# Allegro board kvp_03v1.brd
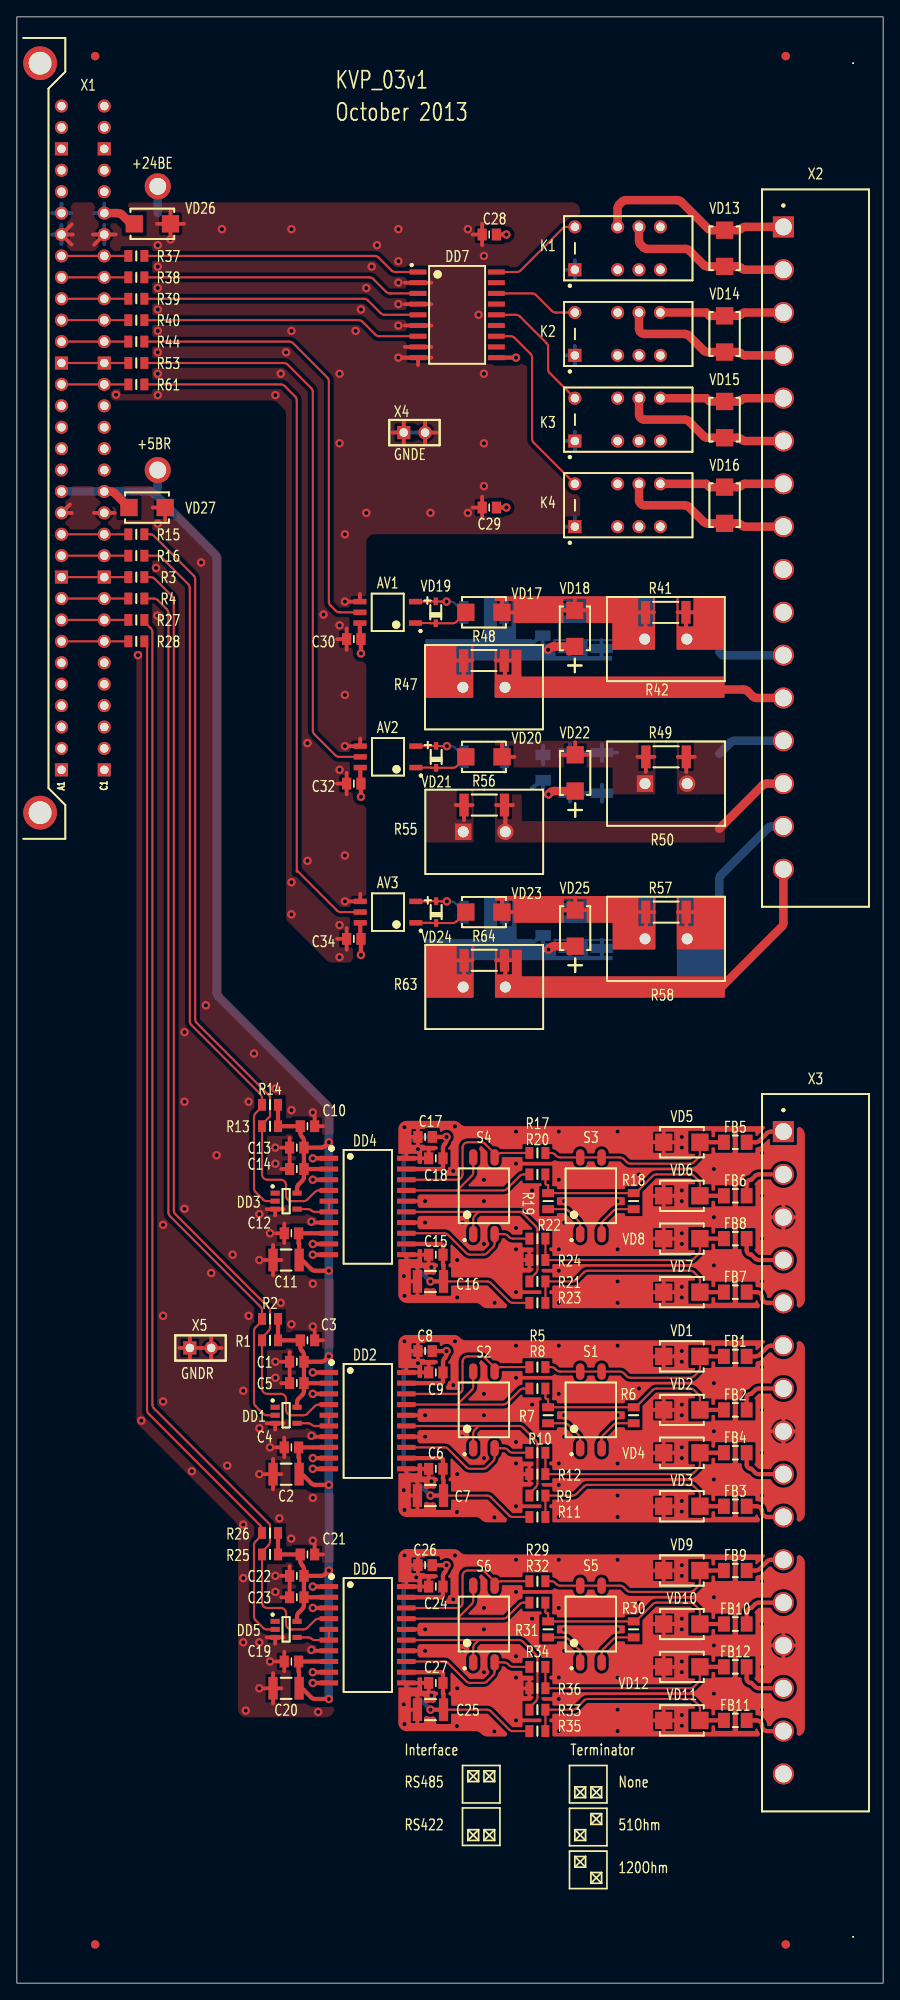
[diagram p0: board, top side]
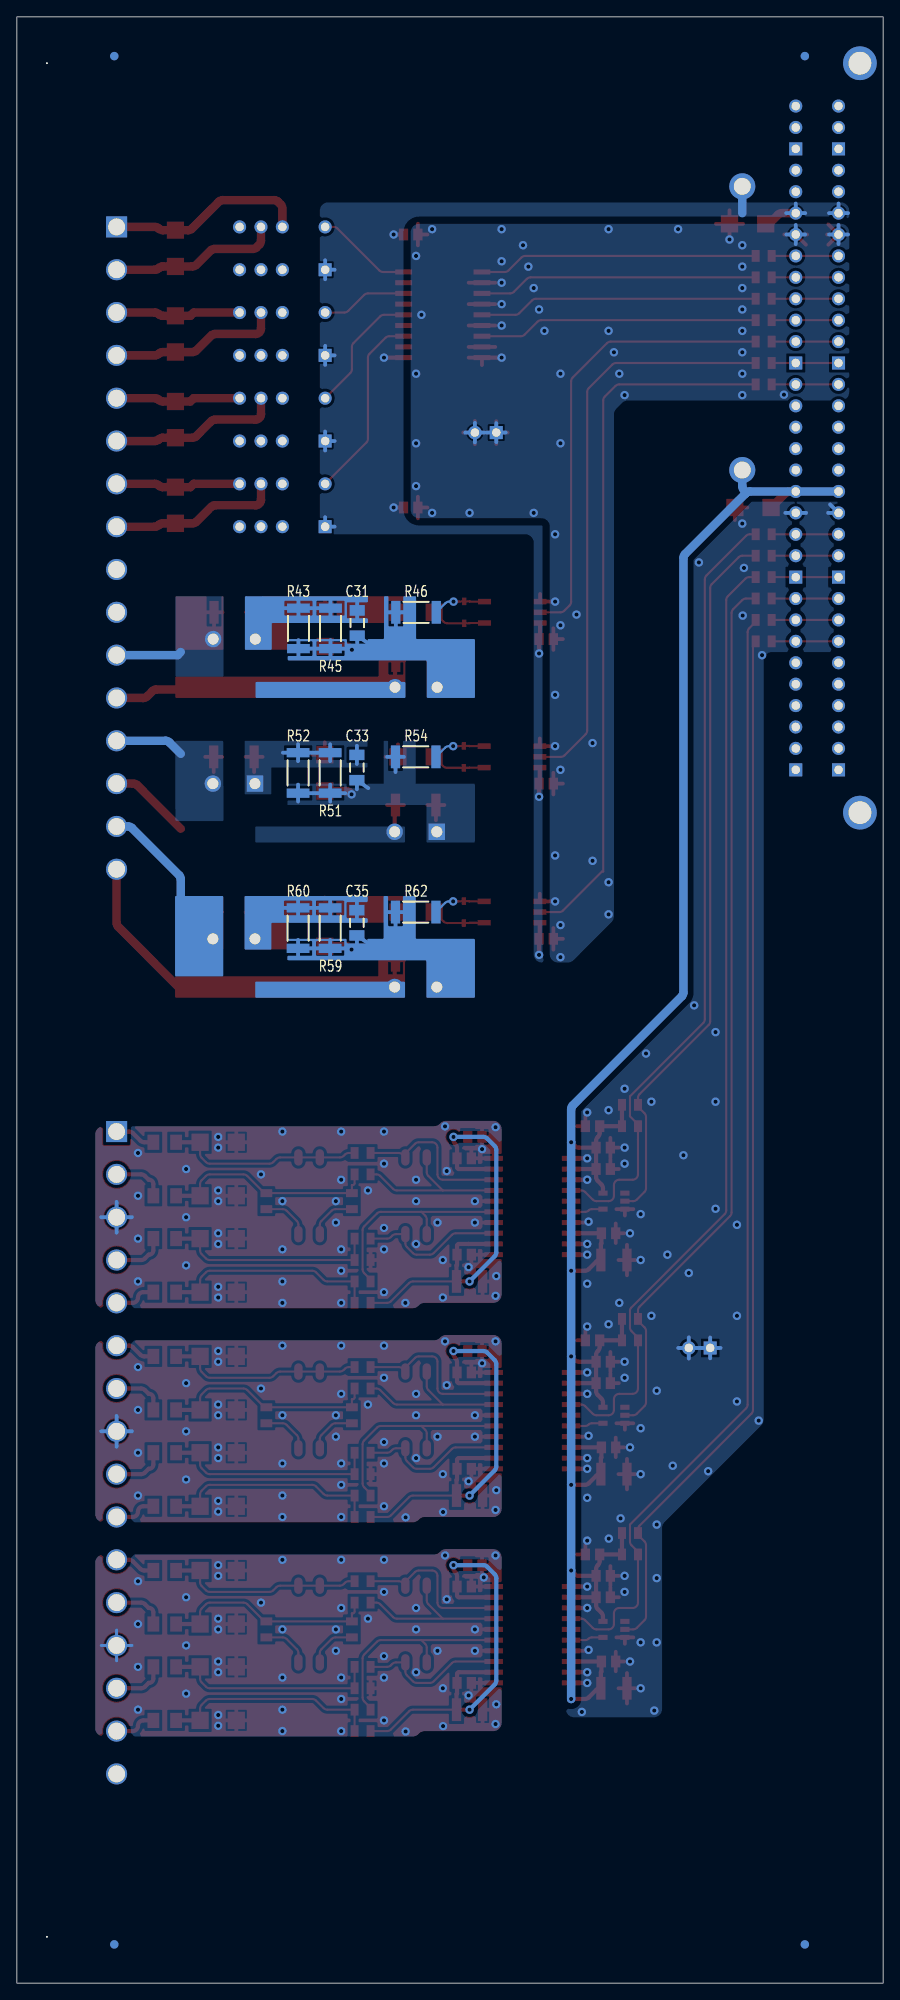
[diagram p1: board, bottom side, seen from below]

Outline 102.87 x 233.25 mm; copper layers: TOP, BOTTOM. Coordinates in mm from the lower left corner of the outline.
Outline path: rectangle 0,0 102.87,233.25

## Design rules (mm)
net group PWR: nets +5BR

## Placement (name value [footprint] x y rotation side)
AV1  ACPL-M50L  [SOIC127P650X260-5]  44.03 162.61 180 top
AV2  ACPL-M50L  [SOIC127P650X260-5]  44.08 145.47 180 top
AV3  ACPL-M50L  [SOIC127P650X260-5]  44.08 127.05 180 top
C1  0.1u  [CAPC2013X95N]  33.24 73.71 180 top
C2  10.0u  [CAPC3225X220N]  31.97 60.38 180 top
C3  0.1u  [CAPC2013X95N]  34.51 76.25 0 top
C4  0.1u  [CAPC2013X95N]  32.6 63.55 180 top
C5  0.01u  [CAPC2013X95N]  33.24 71.17 180 top
C6  0.1u  [CAPC2013X95N]  49.75 61.01 180 top
C7  10.0u  [CAPC3225X220N]  49.12 57.84 180 top
C8  0.01u  [CAPC2013X95N]  48.48 74.98 180 top
C9  0.1u  [CAPC2013X95N]  49.75 72.44 180 top
C10  0.1u  [CAPC2013X95N]  34.51 101.65 0 top
C11  10.0u  [CAPC3225X220N]  31.97 85.78 180 top
C12  0.1u  [CAPC2013X95N]  32.6 88.95 180 top
C13  0.1u  [CAPC2013X95N]  33.24 99.11 180 top
C14  0.01u  [CAPC2013X95N]  33.24 96.57 180 top
C15  0.1u  [CAPC2013X95N]  49.75 86.41 180 top
C16  10.0u  [CAPC3225X220N]  49.12 83.24 180 top
C17  0.01u  [CAPC2013X95N]  48.48 100.38 180 top
C18  0.1u  [CAPC2013X95N]  49.75 97.84 180 top
C19  0.1u  [CAPC2013X95N]  32.6 38.15 180 top
C20  10.0u  [CAPC3225X220N]  31.97 34.98 180 top
C21  0.1u  [CAPC2013X95N]  34.51 50.85 0 top
C22  0.1u  [CAPC2013X95N]  33.24 48.31 180 top
C23  0.01u  [CAPC2013X95N]  33.24 45.77 180 top
C24  0.1u  [CAPC2013X95N]  49.75 47.04 180 top
C25  10.0u  [CAPC3225X220N]  49.12 32.44 180 top
C26  0.01u  [CAPC2013X95N]  48.48 49.58 180 top
C27  0.1u  [CAPC2013X95N]  49.75 35.61 180 top
C28  0.1u  [CAPC2013X95N]  56.1 207.43 180 top
C29  0.1u  [CAPC2013X95N]  56.1 175.04 180 top
C30  0.1u  [CAPC2013X95N]  40.01 159.44 180 top
C31  0.1u  [CAPC3216X145N]  62.45 161.34 270 bottom
C32  0.1u  [CAPC2013X95N]  40.01 142.29 180 top
C33  0.1u  [CAPC3216X145N]  62.49 144.2 270 bottom
C34  0.1u  [CAPC2013X95N]  40.01 123.88 180 top
C35  0.1u  [CAPC3216X145N]  62.49 125.78 270 bottom
DD1  SN74LVC1G14DBV  [SOT95P280X145-5N]  31.97 67.36 0 top
DD2  ADM2587  [SOIC127P1032X265-20]  37.05 72.44 270 top
DD3  SN74LVC1G14DBV  [SOT95P280X145-5N]  31.97 92.76 0 top
DD4  ADM2587  [SOIC127P1032X265-20]  37.05 97.84 270 top
DD5  SN74LVC1G14DBV  [SOT95P280X145-5N]  31.97 41.96 0 top
DD6  ADM2587  [SOIC127P1032X265-20]  37.05 47.04 270 top
DD7  ULN2803A  [SOIC127P1030X265-18N]  52.29 197.91 0 top
FB1  BLM31P  [FB3216X130N]  85.31 74.35 0 top
FB2  BLM31P  [FB3216X130N]  85.31 68 0 top
FB3  BLM31P  [FB3216X130N]  85.31 56.57 0 top
FB4  BLM31P  [FB3216X130N]  85.31 62.92 0 top
FB5  BLM31P  [FB3216X130N]  85.31 99.75 0 top
FB6  BLM31P  [FB3216X130N]  85.31 93.4 0 top
FB7  BLM31P  [FB3216X130N]  85.31 81.97 0 top
FB8  BLM31P  [FB3216X130N]  85.31 88.32 0 top
FB9  BLM31P  [FB3216X130N]  85.31 48.95 0 top
FB10  BLM31P  [FB3216X130N]  85.31 42.6 0 top
FB11  BLM31P  [FB3216X130N]  85.31 31.17 0 top
FB12  BLM31P  [FB3216X130N]  85.31 37.52 0 top
K1  FX2  [RELAY_FX2]  72.58 205.79 90 top
K2  FX2  [RELAY_FX2]  72.58 195.63 90 top
K3  FX2  [RELAY_FX2]  72.58 185.47 90 top
K4  FX2  [RELAY_FX2]  72.58 175.31 90 top
MH1  1.8mm  [MTG_180_310]  16.73 213.15 0 top
MH2  1.8mm  [MTG_180_310]  16.73 179.49 0 top
NOREF  -  [unnamed]  99.3 5.5 0 top
NOREF#2  -  [unnamed#2]  9.3 228.59 0 top
NOREF#3  -  [unnamed]  99.3 227.75 0 top
NOREF#4  -  [unnamed#2]  91.3 228.59 0 top
NOREF#5  -  [unnamed#2]  91.3 4.59 0 top
NOREF#6  -  [unnamed#2]  9.3 4.59 0 top
NOREF#7  -  [unnamed#2]  9.3 4.59 180 bottom
NOREF#8  -  [unnamed#2]  9.3 228.59 180 bottom
NOREF#9  -  [unnamed#2]  91.3 4.59 180 bottom
NOREF#10  -  [unnamed#2]  91.3 228.59 180 bottom
R1  10k  [RESC2013X60N]  30.07 76.25 0 top
R2  10k  [RESC2013X60N]  30.07 78.79 0 top
R3  100  [RESC2013X60N]  14.19 166.79 0 top
R4  100  [RESC2013X60N]  14.19 164.25 0 top
R5  10  [RESC2013X60N]  61.81 73.08 0 top
R6  51  [RESC2013X60N]  73.25 67.36 270 top
R7  120  [RESC2013X60N]  63.09 67.36 270 top
R8  10  [RESC2013X60N]  61.81 70.54 0 top
R9  10  [RESC2013X60N]  61.81 57.84 0 top
R10  10  [RESC2013X60N]  61.81 62.92 0 top
R11  470  [RESC2013X60N]  61.81 55.3 0 top
R12  470  [RESC2013X60N]  61.81 60.38 0 top
R13  10k  [RESC2013X60N]  30.07 101.65 0 top
R14  10k  [RESC2013X60N]  30.07 104.19 0 top
R15  100  [RESC2013X60N]  14.19 171.87 0 top
R16  100  [RESC2013X60N]  14.19 169.33 0 top
R17  10  [RESC2013X60N]  61.81 98.48 0 top
R18  51  [RESC2013X60N]  73.25 92.76 270 top
R19  120  [RESC2013X60N]  63.09 92.76 270 top
R20  10  [RESC2013X60N]  61.81 95.94 0 top
R21  10  [RESC2013X60N]  61.81 83.24 0 top
R22  10  [RESC2013X60N]  61.81 88.32 0 top
R23  470  [RESC2013X60N]  61.81 80.7 0 top
R24  470  [RESC2013X60N]  61.81 85.78 0 top
R25  10k  [RESC2013X60N]  30.07 50.85 0 top
R26  10k  [RESC2013X60N]  30.07 53.39 0 top
R27  100  [RESC2013X60N]  14.19 161.71 0 top
R28  100  [RESC2013X60N]  14.19 159.17 0 top
R29  10  [RESC2013X60N]  61.81 47.68 0 top
R30  51  [RESC2013X60N]  73.25 41.96 270 top
R31  120  [RESC2013X60N]  63.09 41.96 270 top
R32  10  [RESC2013X60N]  61.81 45.14 0 top
R33  10  [RESC2013X60N]  61.81 32.44 0 top
R34  10  [RESC2013X60N]  61.81 37.52 0 top
R35  470  [RESC2013X60N]  61.81 29.9 0 top
R36  470  [RESC2013X60N]  61.81 34.98 0 top
R37  6.2k  [RESC2013X60N]  14.19 204.89 0 top
R38  6.2k  [RESC2013X60N]  14.19 202.35 0 top
R39  6.2k  [RESC2013X60N]  14.19 199.81 0 top
R40  6.2k  [RESC2013X60N]  14.19 197.27 0 top
R41  470  [RESC5025X65N]  77.06 162.61 0 top
R42  5.1k  [RESV500P1300W900L2500H]  77.06 159.44 0 top
R43  1.2k  [RESC5025X65N]  69.44 160.71 90 bottom
R44  2k  [RESC2013X60N]  14.19 194.73 0 top
R45  1k  [RESC5025X65N]  65.62 160.71 90 bottom
R46  1k  [RESC5025X65N]  55.47 162.61 0 bottom
R47  5.1k  [RESV500P1300W900L2500H]  55.47 153.72 0 top
R48  470  [RESC5025X65N]  55.47 156.9 0 top
R49  470  [RESC5025X65N]  77.09 145.47 0 top
R50  5.1k  [RESV500P1300W900L2500H]  77.09 142.29 0 top
R51  1k  [RESC5025X65N]  65.67 143.56 90 bottom
R52  1.2k  [RESC5025X65N]  69.47 143.56 90 bottom
R53  2k  [RESC2013X60N]  14.19 192.19 0 top
R54  1k  [RESC5025X65N]  55.51 145.47 0 bottom
R55  5.1k  [RESV500P1300W900L2500H]  55.51 136.58 0 top
R56  470  [RESC5025X65N]  55.51 139.75 0 top
R57  470  [RESC5025X65N]  77.09 127.05 0 top
R58  5.1k  [RESV500P1300W900L2500H]  77.09 123.88 0 top
R59  1k  [RESC5025X65N]  65.67 125.15 90 bottom
R60  1.2k  [RESC5025X65N]  69.47 125.15 90 bottom
R61  2k  [RESC2013X60N]  14.19 189.65 0 top
R62  1k  [RESC5025X65N]  55.51 127.05 0 bottom
R63  5.1k  [RESV500P1300W900L2500H]  55.51 118.16 0 top
R64  470  [RESC5025X65N]  55.51 121.34 0 top
S1  SmWDL-02  [SW_SMWDL-02]  68.17 68 90 top
S2  SmWDL-02  [SW_SMWDL-02]  55.47 68 90 top
S3  SmWDL-02  [SW_SMWDL-02]  68.17 93.4 90 top
S4  SmWDL-02  [SW_SMWDL-02]  55.47 93.4 90 top
S5  SmWDL-02  [SW_SMWDL-02]  68.17 42.6 90 top
S6  SmWDL-02  [SW_SMWDL-02]  55.47 42.6 90 top
VD1  6.8B  [DIOM5236X261N_NP]  78.96 74.35 180 top
VD2  6.8B  [DIOM5236X261N_NP]  78.96 68 180 top
VD3  6.8B  [DIOM5236X261N_NP]  78.96 56.57 180 top
VD4  6.8B  [DIOM5236X261N_NP]  78.96 62.92 180 top
VD5  6.8B  [DIOM5236X261N_NP]  78.96 99.75 180 top
VD6  6.8B  [DIOM5236X261N_NP]  78.96 93.4 180 top
VD7  6.8B  [DIOM5236X261N_NP]  78.96 81.97 180 top
VD8  6.8B  [DIOM5236X261N_NP]  78.96 88.32 180 top
VD9  6.8B  [DIOM5236X261N_NP]  78.96 48.95 180 top
VD10  6.8B  [DIOM5236X261N_NP]  78.96 42.6 180 top
VD11  6.8B  [DIOM5236X261N_NP]  78.96 31.17 180 top
VD12  6.8B  [DIOM5236X261N_NP]  78.96 37.52 180 top
VD13  300B  [DIOM5236X261N_NP]  84.04 205.79 90 top
VD14  300B  [DIOM5236X261N_NP]  84.04 195.63 90 top
VD15  300B  [DIOM5236X261N_NP]  84.04 185.47 90 top
VD16  300B  [DIOM5236X261N_NP]  84.04 175.31 90 top
VD17  6.8B  [DIOM5236X261N_NP]  55.47 162.61 180 top
VD18  18B  [DIOM5236X261N]  66.26 160.71 270 top
VD19  1N4148WS  [SOD2513X100N]  49.75 162.61 90 top
VD20  6.8B  [DIOM5236X261N_NP]  55.47 145.47 180 top
VD21  1N4148WS  [SOD2513X100N]  49.79 145.47 90 top
VD22  18B  [DIOM5236X261N]  66.3 143.56 270 top
VD23  6.8B  [DIOM5236X261N_NP]  55.47 127.05 180 top
VD24  1N4148WS  [SOD2513X100N]  49.79 127.05 90 top
VD25  18B  [DIOM5236X261N]  66.3 125.15 270 top
VD26  30B  [DIOM5236X261N_NP]  16.09 208.7 0 top
VD27  6.8B  [DIOM5236X261N_NP]  15.46 175.04 0 top
X1  DIN-32x2  [DIN_41612_64_MR]  2.12 183.3 0 top
X2  231-576/001-000  [WAGO_231_576_001_000]  94.83 170.23 0 top
X3  231-576/001-000  [WAGO_231_576_001_000]  94.83 62.92 0 top
X4  GNDE  [HDRV1X2P254]  47.21 183.94 0 top
X5  GNDR  [HDRV1X2P254]  21.81 75.35 0 top

## Library data of the parts
AV1-AV3 = ACPL-M50L
C1-C35 = CAP_NP
DD1 DD3 DD5 = 74LVC1G14_g
DD2 DD4 DD6 = ADM2582E_RW20
DD7 = ULN2803A
FB1-FB12 = FERRITE
K1-K4 = RELAY_FX2
MH1 MH2 = MOUNTING_HOLE_PLATED
R1-R40 R44 R53 R61 = RES_0.125W
R41 R43 R45 R46 R48 R49 R51 R52 R54 R56 R57 R59 R60 R62 R64 = RES_0.5W
R42 R47 R50 R55 R58 R63 = RES_5W
S1-S6 = SWITCH_2
VD1-VD17 VD20 VD23 VD26 VD27 = DIODE_TVS_BI
VD18 VD22 VD25 = DIODE_TVS_UNI
VD19 VD21 VD24 = DIODE
X1 = CON_32X2
X2 X3 = CON_16
X4 X5 = CON_2

## Footprints (pads in the part's own frame, mm; a bottom-side part is the same pattern mirrored in y, then rotated)
CAPC2013X95N
  rect 1.1x1.4 smd: 1(-0.85,0) 2(0.85,0)
CAPC3216X145N
  rect 1.25x1.8 smd: 1(-1.5,0) 2(1.5,0)
CAPC3225X220N
  rect 1.1x2.7 smd: 1(-1.55,0) 2(1.55,0)
DIN_41612_64_MR
  rect 1.55x1.55 hole 1: A1(3.175,-39.37) A10(3.175,-16.51) A20(3.175,8.89) A30(3.175,34.29) C1(8.255,-39.37) C10(8.255,-16.51) C20(8.255,8.89) C30(8.255,34.29)
  round 1.55 hole 1: A2(3.175,-36.83) A3(3.175,-34.29) A4(3.175,-31.75) A5(3.175,-29.21) A6(3.175,-26.67) A7(3.175,-24.13) A8(3.175,-21.59) A9(3.175,-19.05) A11(3.175,-13.97) A12(3.175,-11.43) A13(3.175,-8.89) A14(3.175,-6.35) A15(3.175,-3.81) A16(3.175,-1.27) A17(3.175,1.27) A18(3.175,3.81) A19(3.175,6.35) A21(3.175,11.43) A22(3.175,13.97) A23(3.175,16.51) A24(3.175,19.05) A25(3.175,21.59) A26(3.175,24.13) A27(3.175,26.67) A28(3.175,29.21) A29(3.175,31.75) A31(3.175,36.83) A32(3.175,39.37) C2(8.255,-36.83) C3(8.255,-34.29) C4(8.255,-31.75) C5(8.255,-29.21) C6(8.255,-26.67) C7(8.255,-24.13) C8(8.255,-21.59) C9(8.255,-19.05) C11(8.255,-13.97) C12(8.255,-11.43) C13(8.255,-8.89) C14(8.255,-6.35) C15(8.255,-3.81) C16(8.255,-1.27) C17(8.255,1.27) C18(8.255,3.81) C19(8.255,6.35) C21(8.255,11.43) C22(8.255,13.97) C23(8.255,16.51) C24(8.255,19.05) C25(8.255,21.59) C26(8.255,24.13) C27(8.255,26.67) C28(8.255,29.21) C29(8.255,31.75) C31(8.255,36.83) C32(8.255,39.37)
  round 4 hole 2.7: HOLE1(0.635,-44.45) HOLE2(0.635,44.45)
DIOM5236X261N
  rect 2.05x2.05 smd: A(2.15,0) C(-2.15,0)
DIOM5236X261N_NP
  rect 2.05x2.05 smd: A(2.15,0) C(-2.15,0)
FB3216X130N
  rect 1.4x1.8 smd: 1(-1.35,0) 2(1.35,0)
HDRV1X2P254
  rect 1.55x1.55 hole 1: 1(-1.27,0)
  round 1.6 hole 1: 2(1.27,0)
MTG_180_310
  round 3.1 hole 2: 1(0,0)
RELAY_FX2
  rect 1.55x1.55 hole 1: 1(-2.54,6.32)
  round 1.55 hole 1: 3(-2.54,1.24) 4(-2.54,-1.3) 5(-2.54,-3.84) 6(2.54,-3.84) 7(2.54,-1.3) 8(2.54,1.24) 10(2.54,6.32)
RESC2013X60N
  rect 0.95x1.4 smd: 1(-0.95,0) 2(0.95,0)
RESC5025X65N
  rect 1.1x2.7 smd: 1(-2.4,0) 2(2.4,0)
RESV500P1300W900L2500H
  rect 1.95x1.95 hole 1.3: 1(-2.5,0)
  round 1.95 hole 1.3: 2(2.5,0)
SOD2513X100N
  rect 0.9x0.5 smd: A(1.3,0) C(-1.3,0)
SOIC127P650X260-5
  rect 1.55x0.65 smd: 1(-3.3,1.27) 3(-3.3,-1.27) 4(3.3,-1.27) 5(3.3,0) 6(3.3,1.27)
SOIC127P1030X265-18N
  rect 2x0.6 smd: 1(-4.65,5.08) 2(-4.65,3.81) 3(-4.65,2.54) 4(-4.65,1.27) 5(-4.65,0) 6(-4.65,-1.27) 7(-4.65,-2.54) 8(-4.65,-3.81) 9(-4.65,-5.08) 10(4.65,-5.08) 11(4.65,-3.81) 12(4.65,-2.54) 13(4.65,-1.27) 14(4.65,0) 15(4.65,1.27) 16(4.65,2.54) 17(4.65,3.81) 18(4.65,5.08)
SOIC127P1032X265-20
  rect 0.6x2.2 smd: 1(0,0) 2(1.27,0) 3(2.54,0) 4(3.81,0) 5(5.08,0) 6(6.35,0) 7(7.62,0) 8(8.89,0) 9(10.16,0) 10(11.43,0) 11(11.43,9.2) 12(10.16,9.2) 13(8.89,9.2) 14(7.62,9.2) 15(6.35,9.2) 16(5.08,9.2) 17(3.81,9.2) 18(2.54,9.2) 19(1.27,9.2) 20(0,9.2)
SOT95P280X145-5N
  rect 1.1x0.6 smd: 1(-1.3,0.95) 2(-1.3,0) 3(-1.3,-0.95) 4(1.3,-0.95) 5(1.3,0.95)
SW_SMWDL-02
  oval 1.95x1 smd: 1(-4.55,1.27) 2(-4.55,-1.27) 3(4.55,-1.27) 4(4.55,1.27)
unnamed
  round 0.2 hole 2.7 unplated: (0,0)
unnamed#2
  round 1 smd: (0,0)
WAGO_231_576_001_000
  rect 2.5x2.5 hole 2: 1(-3.81,38.1)
  round 2.5 hole 2: 2(-3.81,33.02) 3(-3.81,27.94) 4(-3.81,22.86) 5(-3.81,17.78) 6(-3.81,12.7) 7(-3.81,7.62) 8(-3.81,2.54) 9(-3.81,-2.54) 10(-3.81,-7.62) 11(-3.81,-12.7) 12(-3.81,-17.78) 13(-3.81,-22.86) 14(-3.81,-27.94) 15(-3.81,-33.02) 16(-3.81,-38.1)

## Nets
GNDE: AV1.4 AV2.4 AV3.4 C28.2 C29.2 C30.2 C32.2 C34.2 DD7.2(2B) DD7.4(4B) DD7.6(6B) DD7.8(8B) DD7.9(GND) VD26.A X1.A26 X1.C26 X4.1 X4.2
GNDR: C1.2 C2.2 C3.2 C4.2 C5.2 C10.2 C11.2 C12.2 C13.2 C14.2 C19.2 C20.2 C21.2 C22.2 C23.2 DD1.3(GND) DD2.1(GND1#0) DD2.3(GND1#1) DD2.7(TXD) DD2.9(GND1#2) DD2.10(GND1#3) DD3.3(GND) DD4.1(GND1#0) DD4.3(GND1#1) DD4.7(TXD) DD4.9(GND1#2) DD4.10(GND1#3) DD5.3(GND) DD6.1(GND1#0) DD6.3(GND1#1) DD6.7(TXD) DD6.9(GND1#2) DD6.10(GND1#3) VD27.A X1.A13 X1.C13 X5.1 X5.2
1#B_A1: DD2.17(B\) R8.1 S2.4(ON)
1#B_A2: DD4.17(B\) R20.1 S4.4(ON)
1#B_A3: DD6.17(B\) R32.1 S6.4(ON)
1#PRD: DD7.14(5C) K3.10(IN-)
1#PRM: DD7.12(7C) K4.10(IN-)
1#WARN: DD7.16(3C) K2.10(IN-)
1#Z_A1: DD2.15(Z\) R9.1 S2.1(N)
1#Z_A2: DD4.15(Z\) R21.1 S4.1(N)
1#Z_A3: DD6.15(Z\) R33.1 S6.1(N)
1A_A1: DD2.18(A) R5.1 S2.3(ON)
1A_A2: DD4.18(A) R17.1 S4.3(ON)
1A_A3: DD6.18(A) R29.1 S6.3(ON)
1ALARM: DD7.18(1C) K1.10(IN-)
1Y_A1: DD2.13(Y) R10.1 S2.2(N)
1Y_A2: DD4.13(Y) R22.1 S4.2(N)
1Y_A3: DD6.13(Y) R34.1 S6.2(N)
#PRD: R39.1 X1.A23 X1.C23
#PRM: R40.1 X1.A22 X1.C22
#WARN: R38.1 X1.A24 X1.C24
+5BR: C1.1 C2.1 C3.1 C4.1 C5.1 C10.1 C11.1 C12.1 C13.1 C14.1 C19.1 C20.1 C21.1 C22.1 C23.1 DD1.5(VCC) DD2.2(VCC#0) DD2.8(VCC#1) DD3.5(VCC) DD4.2(VCC#0) DD4.8(VCC#1) DD5.5(VCC) DD6.2(VCC#0) DD6.8(VCC#1) MH2.1 R1.2 R2.2 R13.2 R14.2 R25.2 R26.2 VD27.C X1.A14 X1.C14
+24BE: AV1.6 AV2.6 AV3.6 C28.1 C29.1 C30.1 C32.1 C34.1 DD7.10(COM) K1.1(IN+) K2.1(IN+) K3.1(IN+) K4.1(IN+) MH1.1 VD26.C X1.A27 X1.C27
_#TXD_A1: DD1.4(OUT) DD2.5(R\E\) DD2.6(DE)
_#TXD_A2: DD3.4(OUT) DD4.5(R\E\) DD4.6(DE)
_#TXD_A3: DD5.4(OUT) DD6.5(R\E\) DD6.6(DE)
_KCLR+: C33.1 R49.1 R50.1 R51.2 R52.2 VD20.C VD22.C
_KCLR-: C33.2 R51.1 R52.1 R54.2 R55.1 R56.1 VD22.A
_KPUSK+: C31.1 R41.1 R42.1 R43.2 R45.2 VD17.C VD18.C
_KPUSK-: C31.2 R43.1 R45.1 R46.2 R47.1 R48.1 VD18.A
_KTM+: C35.1 R57.1 R58.1 R59.2 R60.2 VD23.C VD25.C
_KTM-: C35.2 R59.1 R60.1 R62.2 R63.1 R64.1 VD25.A
_RXD_A1: DD2.4(RXD) R1.1 R3.2
_RXD_A2: DD4.4(RXD) R13.1 R15.2
_RXD_A3: DD6.4(RXD) R25.1 R27.2
ALARM: R37.1 X1.A25 X1.C25
CLEAR: R53.1 X1.A20 X1.C20
CTRLTM: R61.1 X1.A19 X1.C19
KALARM+: K1.8(NC2) VD13.A X2.1
KALARM-: K1.7(02) VD13.C X2.2
KCLEAR+: R49.2 R50.2 X2.13
KCLEAR-: R55.2 R56.2 X2.14
KCTRLTM+: R57.2 R58.2 X2.15
KCTRLTM-: R63.2 R64.2 X2.16
KDR_COM: C24.2 C25.2 C26.2 C27.2 DD6.11(GND2#0) DD6.14(GND2#1) DD6.16(GND2#2) DD6.20(GND2#3) R36.1 VD9.A VD10.A VD11.A VD12.A X3.13
KLN_COM: C15.2 C16.2 C17.2 C18.2 DD4.11(GND2#0) DD4.14(GND2#1) DD4.16(GND2#2) DD4.20(GND2#3) R24.1 VD5.A VD6.A VD7.A VD8.A X3.3
KPRD+: K3.6(NO2) VD15.A X2.5
KPRD-: K3.7(02) VD15.C X2.6
KPRM+: K4.6(NO2) VD16.A X2.7
KPRM-: K4.7(02) VD16.C X2.8
KPUSK+: R41.2 R42.2 X2.11
KPUSK-: R47.2 R48.2 X2.12
KRXDR+: FB9.2 X3.11
KRXDR-: FB10.2 X3.12
KRXLN+: FB5.2 X3.1
KRXLN-: FB6.2 X3.2
KRXTM+: FB1.2 X3.6
KRXTM-: FB2.2 X3.7
KTM_COM: C6.2 C7.2 C8.2 C9.2 DD2.11(GND2#0) DD2.14(GND2#1) DD2.16(GND2#2) DD2.20(GND2#3) R12.1 VD1.A VD2.A VD3.A VD4.A X3.8
KTXDR+: FB12.2 X3.14
KTXDR-: FB11.2 X3.15
KTXLN+: FB8.2 X3.4
KTXLN-: FB7.2 X3.5
KTXTM+: FB4.2 X3.9
KTXTM-: FB3.2 X3.10
KWARN+: K2.6(NO2) VD14.A X2.3
KWARN-: K2.7(02) VD14.C X2.4
N42682_A1: DD1.2(IN) R2.1 R4.2
N42682_A2: DD3.2(IN) R14.1 R16.2
N42682_A3: DD5.2(IN) R26.1 R28.2
N48487_A1: FB3.1 R9.2 R11.2 VD3.C
N48487_A2: FB7.1 R21.2 R23.2 VD7.C
N48487_A3: FB11.1 R33.2 R35.2 VD11.C
N48539_A1: FB1.1 R5.2 S1.3(ON) S1.4(ON) VD1.C
N48539_A2: FB5.1 R17.2 S3.3(ON) S3.4(ON) VD5.C
N48539_A3: FB9.1 R29.2 S5.3(ON) S5.4(ON) VD9.C
N48547_A1: FB2.1 R6.1 R7.1 R8.2 VD2.C
N48547_A2: FB6.1 R18.1 R19.1 R20.2 VD6.C
N48547_A3: FB10.1 R30.1 R31.1 R32.2 VD10.C
N48667_A1: FB4.1 R10.2 R12.2 VD4.C
N48667_A2: FB8.1 R22.2 R24.2 VD8.C
N48667_A3: FB12.1 R34.2 R36.2 VD12.C
N48675_A1: R6.2 S1.2(N)
N48675_A2: R18.2 S3.2(N)
N48675_A3: R30.2 S5.2(N)
N102211_A1: R7.2 S1.1(N)
N102211_A2: R19.2 S3.1(N)
N102211_A3: R31.2 S5.1(N)
PUSK: R44.1 X1.A21 X1.C21
RXDR: R27.1 X1.A8 X1.C8
RXLN: R15.1 X1.A12 X1.C12
RXTM: R3.1 X1.A10 X1.C10
TXDR: R28.1 X1.A7 X1.C7
TXLN: R16.1 X1.A11 X1.C11
TXTM: R4.1 X1.A9 X1.C9
VISO_A1: C6.1 C7.1 C8.1 C9.1 DD2.12(VISOOUT) DD2.19(VISOIN) R11.1
VISO_A2: C15.1 C16.1 C17.1 C18.1 DD4.12(VISOOUT) DD4.19(VISOIN) R23.1
VISO_A3: C24.1 C25.1 C26.1 C27.1 DD6.12(VISOOUT) DD6.19(VISOIN) R35.1
N50971: DD7.1(1B) R37.2
N50975: DD7.3(3B) R38.2
N51011: DD7.5(5B) R39.2
N51031: DD7.7(7B) R40.2
N487123: AV1.5 R44.2
N487155: AV1.1 VD17.A VD19.C
N487159: AV1.3 R46.1 VD19.A
N493408: AV2.5 R53.2
N493440: AV2.1 VD20.A VD21.C
N493444: AV2.3 R54.1 VD21.A
N494431: AV3.5 R61.2
N494463: AV3.1 VD23.A VD24.C
N494467: AV3.3 R62.1 VD24.A

Pads without a net: DD1 1; DD3 1; DD5 1; DD7 11 13 15 17; K1 3 4 5 6; K2 3 4 5 8; K3 3 4 5 8; K4 3 4 5 8; X1 A1 A2 A3 A4 A5 A6 A15 A16 A17 A18 A28 A29 A30 A31 A32 C1 C2 C3 C4 C5 C6 C15 C16 C17 C18 C28 C29 C30 C31 C32 HOLE1 HOLE2; X2 9 10; X3 16

## Via types
v1: diameter 1, hole 0.5, TOP to BOTTOM, 295 vias

## Routing (per net, layer and track width the routed paths; a pad name or vN(x,y) marks a point on that pad's centre or on a via; arc(x,y) is an arc through that point)
GNDE: length 84.6
  TOP w0.45: 40.73,164.79 AV1.4 39.38,163.88 ; 16.64,208.7 VD26.A ; VD26.A 19.85,208.7 ; VD26.A 18.25,207.1 ; VD26.A 18.25,210.3 ; 39.16,141.01 C32.2 ; C32.2 38.03,142.29 ; C32.2 39.16,143.57 ; 46.06,201.72 DD7.2 49.22,201.72 ; 39.16,122.6 C34.2 ; C34.2 38.03,123.88 ; C34.2 39.16,125.16 ; 55.25,206.15 C28.2 ; C28.2 55.25,208.71 ; C28.2 54.12,207.43 ; 49.22,194.09 DD7.8 46.06,194.09 ; X1.A26 6.65,207.43 ; X1.A26 6.51,206.22 ; X1.A26 6.51,208.64 ; 40.77,129.23 AV3.4 39.42,128.32 ; X4.1 45.94,185.29 ; X4.1 44.59,183.94 ; X4.1 45.94,182.58 ; 39.42,146.74 AV2.4 40.77,147.64 ; C29.2 55.25,176.32 ; C29.2 55.25,173.77 ; C29.2 54.12,175.04 ; 46.06,199.18 DD7.4 49.22,199.18 ; X1.C26 11.73,207.43 ; X1.C26 9.17,206.22 ; X1.C26 9.03,207.43 ; C30.2 39.16,160.72 ; C30.2 39.16,158.16 ; C30.2 38.03,159.44 ; 48.48,182.56 X4.2 ; X4.2 49.86,183.94 ; X4.2 48.48,185.31 ; 47.64,191.95 DD7.9 49.22,192.82 ; 49.22,196.63 DD7.6 46.06,196.63
  TOP w0.5: DD7.9 v1(45.3,192.82)
  BOTTOM w0.45: 44.81,183.94 X4.1 ; X4.1 45.94,182.81 ; X4.1 47.07,183.94 ; X4.1 45.94,185.06 ; X1.A26 5.3,208.56 ; X1.A26 5.3,206.3 ; X1.A26 4.17,207.43 ; X1.A26 6.43,207.43 ; X1.C26 11.51,207.43 ; X1.C26 10.38,206.3 ; X1.C26 9.25,207.43 ; X1.C26 10.38,208.56 ; X4.2 49.63,183.94 ; X4.2 47.33,183.94 ; X4.2 48.48,185.09 ; X4.2 48.48,182.78
  vias: v1(11.78,188.43) v1(16.73,206.16) v1(16.73,203.62) v1(16.73,201.08) v1(16.73,198.54) v1(16.73,196) v1(16.73,193.46) v1(16.73,190.92) v1(16.73,188.38) v1(18.25,206.84) v1(24.35,208.06) v1(30.7,188.38) v1(31.34,190.92) v1(31.97,193.46) v1(32.6,208.06) v1(32.6,196) v1(32.6,130.59) v1(32.6,126.78) v1(34.51,147.1) v1(34.51,133.13) v1(36.41,162.34) v1(38.32,190.92) v1(38.32,182.66) v1(38.32,161.07) v1(38.32,143.93) v1(38.32,125.52) v1(38.32,121.7) v1(38.95,171.87) v1(38.95,163.88) v1(38.95,152.82) v1(38.95,146.74) v1(38.95,133.77) v1(38.95,128.32) v1(40.23,196) v1(40.86,198.54) v1(41.49,201.08) v1(41.49,174.41) v1(42.13,203.62) v1(42.77,206.16) v1(45.3,208.06) v1(45.3,204.25) v1(45.3,201.72) v1(45.3,199.18) v1(45.3,196.63) v1(49.12,174.41) v1(53.56,208.06) v1(53.56,174.41) v1(54.83,197.91) v1(55.47,204.89) v1(55.47,190.92) v1(55.47,182.66) v1(55.47,177.59)
GNDR: length 118.5
  TOP w0.45: 36.36,50.85 C21.2 35.36,52.01 ; 30.75,63.55 31.75,63.55 ; 31.75,63.55 31.75,62.4 ; 31.75,63.55 31.75,64.71 ; DD1.3 31.67,66.41 ; DD1.3 29.67,66.41 ; DD1.3 30.67,65.66 ; 29.67,41.01 DD5.3 ; DD5.3 31.67,41.01 ; DD5.3 30.67,40.26 ; 32.39,47.16 C22.2 ; C22.2 32.39,49.47 ; C22.2 31.39,48.31 ; 17.61,173.57 VD27.A 16.13,175.04 ; 30.42,83.97 C11.2 ; C11.2 29.42,85.78 ; C11.2 30.42,87.58 ; C11.2 31.42,85.78 ; 31.75,87.8 31.75,88.95 ; 31.75,88.95 30.75,88.95 ; 31.75,88.95 31.75,90.11 ; 20.54,74.12 X5.1 ; X5.1 21.77,75.35 ; X5.1 19.31,75.35 ; X5.1 20.54,76.58 ; 30.42,58.58 C2.2 ; C2.2 31.42,60.38 ; C2.2 29.42,60.38 ; C2.2 30.42,62.18 ; 30.75,38.15 31.75,38.15 ; 31.75,38.15 31.75,37 ; 31.75,38.15 31.75,39.31 ; 35.5,90.22 DD4.7 ; 31.39,73.71 C1.2 ; C1.2 32.39,72.56 ; C1.2 32.39,74.87 ; 32.39,72.33 C5.2 31.39,71.17 ; 36.36,76.25 C3.2 35.36,77.41 ; 9.15,174.41 X1.C13 11.61,174.41 ; 23.08,74.1 X5.2 ; X5.2 24.33,75.35 ; X5.2 23.08,76.6 ; X5.2 21.83,75.35 ; 35.5,64.82 DD2.7 ; 32.39,97.73 C14.2 31.39,96.57 ; 35.5,39.42 DD6.7 ; C20.2 30.42,36.78 ; C20.2 31.42,34.98 ; C20.2 29.42,34.98 ; C20.2 30.42,33.17 ; 35.36,102.81 C10.2 36.36,101.65 ; C13.2 32.39,100.27 ; C13.2 32.39,97.96 ; C13.2 31.39,99.11 ; 29.67,91.81 DD3.3 ; DD3.3 30.67,91.06 ; DD3.3 31.67,91.81 ; 31.39,45.77 C23.2 32.39,46.93 ; 6.29,175.4 X1.A13 6.53,174.41
  TOP w0.5: DD2.10 v1(35.15,61.01) ; DD4.9 v1(35.15,87.68) ; DD6.10 v1(35.15,35.61) ; DD2.3 v1(35.15,69.9) ; DD6.3 v1(35.15,44.5) ; DD4.1 v1(35.15,97.84) ; DD2.9 v1(35.15,62.28) ; DD6.1 v1(35.15,47.04) ; DD2.1 v1(35.15,72.44) ; DD4.10 v1(35.15,86.41) ; DD4.3 v1(35.15,95.3) ; DD6.9 v1(35.15,36.88)
  BOTTOM w0.45: 11.61,174.41 X1.C13 9.15,174.41 ; X5.1 21.77,75.35 ; X5.1 19.31,75.35 ; X5.1 20.54,74.12 ; X5.1 20.54,76.58 ; 6.29,175.4 X1.A13 6.53,174.41 ; X5.2 23.08,76.6 ; X5.2 24.33,75.35 ; X5.2 23.08,74.1 ; X5.2 21.83,75.35
  vias: v1(14.38,157.53) v1(14.78,66.73) v1(16.53,167.88) v1(16.73,173.14) v1(16.68,162.23) v1(17.36,89.95) v1(17.36,79.16) v1(17.36,69) v1(19.91,112.81) v1(19.91,104.56) v1(19.91,91.86) v1(20.78,60.73) v1(21.88,168.53) v1(22.45,115.99) v1(23.08,84.24) v1(23.71,98.21) v1(24.98,61.38) v1(25.62,86.41) v1(26.89,70.27) v1(26.89,54.4) v1(26.89,48.05) v1(26.89,40.42) v1(27.18,32.33) v1(27.52,104.56) v1(27.52,79.16) v1(28.16,110.28) v1(28.8,91.22) v1(28.8,85.78) v1(28.8,65.83) v1(28.8,60.38) v1(28.8,40.42) v1(28.8,34.98) v1(30.07,88.95) v1(30.07,63.55) v1(30.07,38.15) v1(30.7,106.1) v1(30.7,99.11) v1(30.7,97.21) v1(30.7,73.71) v1(30.7,71.81) v1(30.7,48.31) v1(30.7,46.41) v1(31.18,55.13) v1(31.34,80.7) v1(32.6,103.56) v1(32.6,78.16) v1(32.58,52.73) v1(34.98,90.33) v1(34.98,64.93) v1(34.98,39.53) v1(35.15,103.29) v1(35.15,82.97) v1(35.15,77.89) v1(35.15,57.57) v1(35.15,52.49) v1(35.78,32.17)
1#B_A1: length 20
  TOP w0.25: 52.29,68.63 54.01,70.35 arc(54.15,70.56) 54.2,70.8 S2.4 ; 52.29,68.63 DD2.17 ; 52.29,68.63 57.74,68.63 arc(57.98,68.68) 58.19,68.82 59.72,70.35 arc(59.93,70.49) 60.17,70.54 R8.1
1#B_A2: length 20
  TOP w0.25: 52.29,94.03 DD4.17 ; 52.29,94.03 54.01,95.75 arc(54.15,95.96) 54.2,96.2 S4.4 ; 52.29,94.03 57.74,94.03 arc(57.98,94.08) 58.19,94.22 59.72,95.75 arc(59.93,95.89) 60.17,95.94 R20.1
1#B_A3: length 20
  TOP w0.25: 52.29,43.23 54.01,44.95 arc(54.15,45.16) 54.2,45.4 S6.4 ; 52.29,43.23 57.74,43.23 arc(57.98,43.28) 58.19,43.42 59.72,44.95 arc(59.93,45.09) 60.17,45.14 R32.1 ; 52.29,43.23 DD6.17
1#PRD: length 15.2
  TOP w0.25: DD7.14 59.28,197.91 arc(59.52,197.86) 59.73,197.72 62.9,194.55 arc(63.04,194.34) 63.09,194.1 63.09,191.45 arc(63.13,191.21) 63.27,191 K3.10
1#PRM: length 22.4
  TOP w0.25: K4.10 61.37,182.75 arc(61.23,182.95) 61.18,183.2 61.18,192.83 arc(61.13,193.07) 60.99,193.28 59.09,195.18 arc(58.89,195.32) 58.65,195.37 DD7.12
1#WARN: length 10.2
  TOP w0.25: DD7.16 61.19,200.44 arc(61.43,200.4) 61.63,200.26 63.53,198.36 arc(63.74,198.22) 63.98,198.17 K2.10
1#Z_A1: length 25.9
  TOP w0.25: S2.1 54.2,65.2 arc(54.24,65.44) 54.38,65.64 54.83,66.09 ; 54.83,66.09 59.65,66.09 arc(59.89,66.05) 60.1,65.91 61.63,64.38 arc(61.77,64.17) 61.81,63.93 61.81,59.28 arc(61.77,59.03) 61.63,58.83 61.02,58.22 arc(60.91,58.05) R9.1 ; 54.83,66.09 DD2.15
1#Z_A2: length 25.9
  TOP w0.25: DD4.15 54.83,91.49 ; 54.83,91.49 54.38,91.05 arc(54.24,90.84) 54.2,90.6 S4.1 ; 54.83,91.49 59.65,91.49 arc(59.89,91.45) 60.1,91.31 61.63,89.78 arc(61.77,89.57) 61.81,89.33 61.81,84.68 arc(61.77,84.43) 61.63,84.23 61.02,83.62 arc(60.91,83.45) R21.1
1#Z_A3: length 25.9
  TOP w0.25: 54.83,40.69 59.65,40.69 arc(59.89,40.65) 60.1,40.51 61.63,38.98 arc(61.77,38.77) 61.81,38.53 61.81,33.88 arc(61.77,33.63) 61.63,33.43 61.02,32.82 arc(60.91,32.65) R33.1 ; 54.83,40.69 DD6.15 ; 54.83,40.69 54.38,40.24 arc(54.24,40.04) 54.2,39.8 S6.1
1A_A1: length 19.7
  TOP w0.25: R5.1 57.53,73.08 arc(57.28,73.03) 57.08,72.89 S2.3 56.73,72.76 arc(56.69,73) 56.55,73.21 55.6,74.16 arc(55.39,74.3) 55.15,74.35 53.56,74.35 arc(53.11,74.16) 52.92,73.71 52.92,70.54 arc(52.74,70.09) 52.29,69.9 DD2.18
1A_A2: length 19.7
  TOP w0.25: DD4.18 52.29,95.3 arc(52.74,95.49) 52.92,95.94 52.92,99.11 arc(53.11,99.56) 53.56,99.75 55.15,99.75 arc(55.39,99.7) 55.6,99.56 56.55,98.61 arc(56.69,98.4) 56.73,98.16 S4.3 57.08,98.29 arc(57.28,98.43) 57.53,98.48 R17.1
1A_A3: length 19.7
  TOP w0.25: DD6.18 52.29,44.5 arc(52.74,44.69) 52.92,45.14 52.92,48.31 arc(53.11,48.76) 53.56,48.95 55.15,48.95 arc(55.39,48.9) 55.6,48.76 56.55,47.81 arc(56.69,47.6) 56.73,47.36 S6.3 57.08,47.49 arc(57.28,47.63) 57.53,47.68 R29.1
1ALARM: length 11.5
  TOP w0.25: K1.10 65.25,208.33 arc(65.01,208.29) 64.8,208.15 59.83,203.17 arc(59.62,203.03) 59.38,202.99 DD7.18
1Y_A1: length 17.5
  TOP w0.25: DD2.13 50.76,63.55 arc(51,63.51) 51.21,63.37 53.37,61.2 arc(53.58,61.06) 53.82,61.01 55.39,61.01 arc(55.63,61.06) 55.84,61.2 56.55,61.91 arc(56.69,62.12) 56.73,62.36 S2.2 57.85,63.45 arc(58.09,63.4) 58.3,63.26 58.45,63.1 arc(58.66,62.97) 58.9,62.92 R10.1
1Y_A2: length 17.5
  TOP w0.25: R22.1 58.9,88.32 arc(58.66,88.37) 58.45,88.5 58.3,88.66 arc(58.09,88.8) 57.85,88.85 S4.2 56.73,87.76 arc(56.69,87.52) 56.55,87.31 55.84,86.6 arc(55.63,86.46) 55.39,86.41 53.82,86.41 arc(53.58,86.46) 53.37,86.6 51.21,88.77 arc(51,88.91) 50.76,88.95 DD4.13
1Y_A3: length 17.5
  TOP w0.25: DD6.13 50.76,38.15 arc(51,38.11) 51.21,37.97 53.37,35.8 arc(53.58,35.66) 53.82,35.61 55.39,35.61 arc(55.63,35.66) 55.84,35.8 56.55,36.51 arc(56.69,36.72) 56.73,36.96 S6.2 57.85,38.05 arc(58.09,38) 58.3,37.86 58.45,37.7 arc(58.66,37.57) 58.9,37.52 R34.1
#PRD: length 7.9
  TOP w0.25: X1.A23 X1.C23 R39.1
#PRM: length 7.9
  TOP w0.25: X1.A22 X1.C22 R40.1
#WARN: length 7.9
  TOP w0.25: R38.1 X1.C24 X1.A24
+5BR: length 260.7
  TOP w0.5: DD2.2 C5.1 ; C5.1 C1.1 ; C5.1 34.09,70.24 arc(34.04,69.99) 33.9,69.79 33.46,69.34 arc(33.32,69.13) 33.27,68.89 DD1.5 ; DD6.8 C19.1 33.45,36.95 33.52,36.89 C20.1 33.61,34.98 arc(33.86,34.93) 34.06,34.79 34.96,33.9 arc(35.17,33.76) 35.41,33.71 v1(37.05,33.71) ; C13.1 36.15,99.11 arc(36.4,99.16) 36.6,99.3 v1(37.05,99.75) ; C13.1 C14.1 ; C13.1 34.09,99.91 arc(34.04,100.15) 33.9,100.36 33.85,100.41 arc(33.71,100.62) 33.66,100.86 C10.1 R13.2 R14.2 ; C1.1 36.15,73.71 arc(36.4,73.76) 36.6,73.9 v1(37.05,74.35) ; C1.1 34.09,74.51 arc(34.04,74.75) 33.9,74.95 33.85,75.01 arc(33.71,75.22) 33.66,75.46 C3.1 R1.2 R2.2 ; DD6.2 C23.1 ; C23.1 34.09,44.84 arc(34.04,44.59) 33.9,44.39 33.46,43.94 arc(33.32,43.73) 33.27,43.49 DD5.5 ; C23.1 C22.1 ; C22.1 36.15,48.31 arc(36.4,48.36) 36.6,48.5 v1(37.05,48.95) ; C22.1 34.09,49.11 arc(34.04,49.35) 33.9,49.55 33.85,49.61 arc(33.71,49.82) 33.66,50.06 C21.1 R25.2 R26.2 ; DD2.8 C4.1 33.45,62.35 33.52,62.29 C2.1 33.61,60.38 arc(33.86,60.33) 34.06,60.19 34.96,59.3 arc(35.17,59.16) 35.41,59.11 v1(37.05,59.11) ; DD4.8 C12.1 33.45,87.75 33.52,87.69 C11.1 33.61,85.78 arc(33.86,85.73) 34.06,85.59 34.96,84.69 arc(35.17,84.56) 35.41,84.51 v1(37.05,84.51) ; DD3.5 33.27,94.29 arc(33.32,94.53) 33.46,94.74 33.9,95.19 arc(34.04,95.39) 34.09,95.64 C14.1 ; C14.1 DD4.2
  TOP w1: X1.C14 11.14,176.95 arc(11.39,176.9) 11.59,176.76 VD27.C
  BOTTOM w1: 16.36,176.68 16.28,176.76 arc(16.08,176.9) 15.83,176.95 X1.C14 X1.A14 ; 16.36,176.68 23.53,169.52 arc(23.67,169.31) 23.71,169.07 23.71,117.52 arc(23.76,117.28) 23.9,117.07 36.86,104.11 arc(37,103.91) 37.05,103.66 v1(37.05,99.75) v1(37.05,84.51) v1(37.05,74.35) v1(37.05,59.11) v1(37.05,48.95) v1(37.05,33.71) ; 16.36,176.68 16.36,176.69 arc(16.41,176.93) 16.55,177.13 arc(16.68,177.34) 16.73,177.58 MH2.1
+24BE: length 42.1
  TOP w0.5: AV3.6 40.77,123.96 C34.1 v1(40.86,121.97) ; v1(40.86,140.73) C32.1 40.77,142.38 40.77,144.2 ; C29.1 v1(58.13,175.04) ; AV1.6 40.73,159.74 arc(40.77,159.58) C30.1 v1(40.86,157.73) ; DD7.10 v1(59.27,192.82) ; C28.1 v1(58.13,207.43)
  TOP w1: X1.C27 12.02,209.97 arc(12.27,209.92) 12.47,209.78 13.37,208.89 arc(13.58,208.75) 13.82,208.7 VD26.C
  BOTTOM w0.45: X1.C27 11.51,209.97 ; X1.C27 9.25,209.97 ; X1.C27 10.38,211.1 ; 65.13,193.09 K2.1 ; K2.1 66.26,191.97 ; K2.1 66.26,194.22 ; K3.1 66.26,184.06 ; K3.1 65.13,182.93 ; K3.1 66.26,181.81 ; 66.26,173.9 K4.1 65.13,172.77 ; 66.26,202.12 K1.1 ; K1.1 66.26,204.38 ; K1.1 65.13,203.25 ; X1.A27 6.43,209.97 ; X1.A27 5.3,211.1 ; X1.A27 4.17,209.97
  BOTTOM w1: MH1.1 16.73,209.97
_#TXD_A1: length 5.1
  TOP w0.25: DD2.5 DD2.6 35.37,66.09 arc(35.16,66.14) 34.98,66.25 arc(34.81,66.37) 34.6,66.41 DD1.4
_#TXD_A2: length 5.1
  TOP w0.25: DD4.5 DD4.6 35.37,91.49 arc(35.16,91.54) 34.98,91.65 arc(34.81,91.77) 34.6,91.81 DD3.4
_#TXD_A3: length 5.1
  TOP w0.25: DD6.5 DD6.6 35.37,40.69 arc(35.16,40.74) 34.98,40.85 arc(34.81,40.97) 34.6,41.01 DD5.4
_KCLR+: length 22.8
  TOP w0.45: R49.1 75.7,145.47 ; R49.1 74.69,143.66 ; R49.1 73.69,145.47 ; 64.82,145.71 VD22.C ; VD22.C 67.78,145.71 ; VD22.C 66.3,147.19 ; 57.62,146.95 VD20.C 59.09,145.47
  BOTTOM w0.45: R52.2 69.47,146.97 ; R52.2 67.67,145.96 ; R52.2 69.47,144.96 ; R52.2 71.28,145.96 ; 65.67,144.96 R51.2 ; R51.2 67.47,145.96 ; R51.2 65.67,146.97 ; 62.49,146.78 C33.1 62.49,144.62
_KCLR-: length 23.1
  TOP w0.45: 52.1,139.75 53.1,139.75 ; 53.1,139.75 54.11,139.75 ; 53.1,139.75 53.1,137.95
  TOP w1: v1(63.12,141.02) 63.33,141.23 arc(63.53,141.37) 63.78,141.41 VD22.A
  BOTTOM w0.45: 56.9,145.47 R54.2 ; R54.2 57.91,143.66 ; R54.2 58.91,145.47 ; R51.1 65.67,142.17 ; R51.1 67.47,141.16 ; R51.1 63.86,141.16 ; R51.1 65.67,140.16 ; R52.1 69.47,142.17 ; R52.1 67.67,141.16 ; R52.1 69.47,140.16 ; 61.14,141.76 C33.2 62.49,141.62
  BOTTOM w0.5: R55.1 52.97,136.62
_KPUSK+: length 22.8
  TOP w0.45: 74.66,160.81 R41.1 ; R41.1 75.66,162.61 ; R41.1 73.65,162.61 ; 59.09,162.61 VD17.C 57.62,164.09 ; VD18.C 66.26,164.34 ; VD18.C 67.74,162.86 ; VD18.C 64.78,162.86
  BOTTOM w0.45: 69.44,162.1 R43.2 ; R43.2 69.44,164.11 ; R43.2 67.63,163.11 ; R43.2 71.24,163.11 ; 65.62,162.1 R45.2 ; R45.2 65.62,164.11 ; R45.2 67.43,163.11 ; 62.45,161.76 C31.1 62.45,163.92
_KPUSK-: length 23.1
  TOP w0.45: 53.06,155.09 53.06,156.9 ; 53.06,156.9 54.07,156.9 ; 53.06,156.9 52.06,156.9
  TOP w1: VD18.A 63.74,158.56 arc(63.49,158.51) 63.29,158.37 v1(63.09,158.17)
  BOTTOM w0.45: 57.87,160.81 R46.2 ; R46.2 56.86,162.61 ; R46.2 58.87,162.61 ; 67.63,158.31 R43.1 ; R43.1 69.44,157.31 ; R43.1 69.44,159.31 ; 62.45,158.76 C31.2 61.1,158.9 ; R45.1 65.62,159.31 ; R45.1 65.62,157.31 ; R45.1 67.43,158.31 ; R45.1 63.82,158.31
  BOTTOM w0.5: R47.1 52.92,153.76
_KTM+: length 22.8
  TOP w0.45: R57.1 75.7,127.05 ; R57.1 73.69,127.05 ; R57.1 74.69,125.25 ; 59.09,127.05 VD23.C 57.62,128.53 ; VD25.C 66.3,128.78 ; VD25.C 64.82,127.3 ; VD25.C 67.78,127.3
  BOTTOM w0.45: R59.2 65.67,128.55 ; R59.2 65.67,126.55 ; R59.2 67.47,127.55 ; 62.49,126.2 C35.1 62.49,128.36 ; 69.47,126.55 R60.2 ; R60.2 71.28,127.55 ; R60.2 67.67,127.55 ; R60.2 69.47,128.55
_KTM-: length 23.1
  TOP w0.45: 53.1,119.53 53.1,121.34 ; 53.1,121.34 52.1,121.34 ; 53.1,121.34 54.11,121.34
  TOP w1: v1(63.12,122.61) 63.33,122.81 arc(63.53,122.95) 63.78,123 VD25.A
  BOTTOM w0.45: 69.47,121.75 R60.1 ; R60.1 69.47,123.75 ; R60.1 67.67,122.75 ; 62.49,123.2 C35.2 61.14,123.34 ; 57.91,125.25 R62.2 ; R62.2 58.91,127.05 ; R62.2 56.9,127.05 ; 65.67,121.75 R59.1 ; R59.1 63.86,122.75 ; R59.1 67.47,122.75 ; R59.1 65.67,123.75
  BOTTOM w0.5: R63.1 52.97,118.2
_RXD_A1: length 114
  TOP w0.25: R3.2 15.91,166.79 arc(16.15,166.74) 16.36,166.6 18.45,164.51 arc(18.59,164.31) 18.64,164.07 18.64,91.67 arc(18.68,91.43) 18.82,91.22 29.94,80.11 arc(30.03,79.96) 30.07,79.8 30.07,77.79 arc(30.02,77.54) 29.88,77.34 29.3,76.76 arc(29.16,76.55) 29.11,76.31 R1.1 29.11,70.54 arc(29.3,70.09) 29.75,69.9 31.34,69.9 arc(31.78,69.72) 31.97,69.27 31.97,68 arc(32.16,67.55) 32.6,67.36 34.04,67.36 arc(34.28,67.41) 34.49,67.55 35.39,68.45 arc(35.59,68.59) 35.84,68.63 DD2.4
_RXD_A2: length 93.7
  TOP w0.25: R15.2 15.83,171.87 arc(16.08,171.82) 16.28,171.68 20.99,166.98 arc(21.13,166.77) 21.18,166.53 21.18,114.35 arc(21.22,114.1) 21.36,113.9 30.07,105.19 30.07,102.83 29.11,101.88 R13.1 29.11,95.94 arc(29.3,95.49) 29.75,95.3 31.34,95.3 arc(31.78,95.12) 31.97,94.67 31.97,93.4 arc(32.16,92.95) 32.6,92.76 34.04,92.76 arc(34.28,92.81) 34.49,92.95 35.39,93.85 arc(35.59,93.99) 35.84,94.03 DD4.4
_RXD_A3: length 133.8
  TOP w0.25: DD6.4 35.84,43.23 arc(35.59,43.19) 35.39,43.05 34.49,42.15 arc(34.28,42.01) 34.04,41.96 32.6,41.96 arc(32.16,42.15) 31.97,42.6 31.97,43.87 arc(31.78,44.32) 31.34,44.5 29.75,44.5 arc(29.3,44.69) 29.11,45.14 R25.1 29.11,50.91 arc(29.16,51.15) 29.3,51.36 29.88,51.94 arc(30.02,52.14) 30.07,52.39 30.07,54.4 16.28,68.18 arc(16.14,68.38) 16.09,68.63 16.09,160.27 arc(16.05,160.51) 15.91,160.72 15.3,161.33 arc(15.18,161.5) R27.2
ALARM: length 7.9
  TOP w0.25: X1.A25 X1.C25 R37.1
CLEAR: length 7.9
  TOP w0.25: R53.1 X1.C20 X1.A20
CTRLTM: length 7.9
  TOP w0.25: X1.A19 X1.C19 R61.1
KALARM+: length 23.9
  TOP w1: X2.1 86.47,208.33 arc(86.22,208.29) 86.02,208.15 86,208.13 arc(85.79,207.99) 85.55,207.94 VD13.A 82.53,207.94 arc(82.29,207.99) 82.08,208.13 78.89,211.32 arc(78.68,211.46) 78.44,211.51 72.31,211.51 arc(72.07,211.46) 71.86,211.32 71.53,210.99 arc(71.39,210.78) 71.34,210.54 K1.8
KALARM-: length 20.2
  TOP w1: K1.7 73.88,206.69 arc(73.93,206.45) 74.07,206.24 74.4,205.91 arc(74.61,205.77) 74.85,205.72 79.41,205.72 arc(79.65,205.67) 79.85,205.53 81.56,203.83 arc(81.77,203.69) 82.01,203.64 VD13.C 85.55,203.64 arc(85.79,203.6) 86,203.46 86.02,203.44 arc(86.22,203.3) 86.47,203.25 X2.2
KCLEAR+: length 12
  TOP w0.45: 79.5,143.66 R49.2 ; R49.2 78.49,145.47 ; R49.2 80.5,145.47
  BOTTOM w1: 83.41,145.84 84.76,147.19 arc(84.96,147.33) 85.21,147.37 X2.13
KCLEAR-: length 15
  TOP w0.45: 58.91,139.75 R56.2 56.9,139.75
  TOP w0.5: R55.2 58.01,139.51 arc(57.98,139.64) R56.2
  TOP w1: 83.41,136.94 88.57,142.11 arc(88.77,142.25) 89.02,142.29 X2.14
KCTRLTM+: length 17
  TOP w0.45: 79.5,125.25 R57.2 ; R57.2 78.49,127.05 ; R57.2 80.5,127.05
  BOTTOM w1: X2.15 89.65,137.21 arc(89.41,137.17) 89.2,137.03 83.59,131.42 arc(83.45,131.21) 83.41,130.97 83.41,128.06
KCTRLTM-: length 22.6
  TOP w0.45: 56.9,121.34 R64.2 58.91,121.34
  TOP w0.5: R63.2 58.01,121.1 arc(57.98,121.23) R64.2
  TOP w1: X2.16 91.03,125.78 arc(90.98,125.54) 90.84,125.33 83.41,117.89
KDR_COM: length 57.1
  TOP w0.45: X3.13 92.63,40.06 ; X3.13 91.03,41.66 ; X3.13 91.03,38.45 ; X3.13 89.42,40.06 ; 60.04,34.98 R36.1 ; R36.1 60.87,33.92 ; R36.1 60.87,36.03 ; 76.81,41.22 VD10.A ; VD10.A 75.43,42.6 ; VD10.A 78.19,42.6 ; VD10.A 76.81,43.98 ; VD12.A 78.19,37.52 ; VD12.A 75.43,37.52 ; VD12.A 76.81,36.14 ; VD12.A 76.81,38.9 ; 76.81,47.57 VD9.A ; VD9.A 75.43,48.95 ; VD9.A 78.19,48.95 ; VD9.A 76.81,50.33 ; 46.25,47.7 DD6.20 47.7,47.04 ; 48.9,34.56 C27.2 48,35.61 ; VD11.A 78.19,31.17 ; VD11.A 76.81,32.55 ; VD11.A 76.81,29.79 ; VD11.A 75.43,31.17 ; DD6.16 47.7,41.96 ; 48.9,48.1 C24.2 48,47.04 ; 46.73,49.58 C26.2 ; C26.2 47.63,50.64 ; C26.2 47.63,48.53 ; 46.66,32.44 47.56,32.44 ; 47.56,32.44 47.56,34.14 ; 47.56,32.44 47.56,30.73 ; 47.7,35.61 DD6.11 46.25,34.96 ; DD6.14 47.7,39.42
  BOTTOM w0.35: X3.13 91.03,41.89 ; X3.13 91.03,38.23 ; X3.13 89.2,40.06 ; X3.13 92.85,40.06
  vias: v1(45.94,33.07) v1(46.02,50.73) v1(46.02,30.73) v1(47.42,48.13) v1(48.48,41.96) v1(48.48,39.42) v1(49.23,34.13) v1(51.83,45.53) v1(52.02,50.73) v1(52.29,34.98) v1(52.26,30.49) v1(52.92,39.42) v1(55.47,44.5) v1(55.47,41.96) v1(55.47,36.88) v1(56.7,29.86) v1(59.27,50.22) v1(59.27,46.41) v1(59.27,38.79) v1(59.27,36.25) v1(59.27,31.17) v1(61.18,43.23) v1(64.36,50.22) v1(64.36,44.5) v1(64.36,36.25) v1(64.36,33.71) v1(64.36,29.9) v1(64.99,41.96) v1(64.99,39.42) v1(71.34,50.22) v1(71.34,41.96) v1(71.34,36.25) v1(71.34,32.44) v1(71.34,29.9) v1(73.88,45.14) v1(78.96,49.58) v1(78.96,48.31) v1(78.96,43.23) v1(78.96,41.96) v1(78.96,38.15) v1(78.96,36.88) v1(78.96,31.8) v1(78.96,30.53) v1(82.77,45.77) v1(82.77,40.06) v1(82.77,34.34) v1(88.48,47.68) v1(88.48,42.6) v1(88.48,37.52) v1(88.48,32.44)
KLN_COM: length 57.1
  TOP w0.45: R24.1 60.87,86.83 ; R24.1 60.87,84.72 ; R24.1 60.04,85.78 ; 48,86.41 C15.2 48.9,85.36 ; 75.43,93.4 VD6.A ; VD6.A 76.81,92.02 ; VD6.A 78.19,93.4 ; VD6.A 76.81,94.78 ; 75.43,99.75 VD5.A ; VD5.A 76.81,101.13 ; VD5.A 76.81,98.37 ; VD5.A 78.19,99.75 ; X3.3 92.63,90.86 ; X3.3 89.42,90.86 ; X3.3 91.03,89.25 ; X3.3 91.03,92.46 ; DD4.14 47.7,90.22 ; 48,97.84 C18.2 48.9,98.9 ; C17.2 47.63,101.44 ; C17.2 47.63,99.33 ; C17.2 46.73,100.38 ; 75.43,88.32 VD8.A ; VD8.A 76.81,89.7 ; VD8.A 78.19,88.32 ; VD8.A 76.81,86.94 ; DD4.16 47.7,92.76 ; VD7.A 78.19,81.97 ; VD7.A 76.81,80.59 ; VD7.A 75.43,81.97 ; VD7.A 76.81,83.35 ; 47.7,97.84 DD4.20 46.25,98.5 ; 47.56,81.53 47.56,83.24 ; 47.56,83.24 47.56,84.94 ; 47.56,83.24 46.66,83.24 ; 47.7,86.41 DD4.11 46.25,85.76
  BOTTOM w0.45: X3.3 91.03,92.69 ; X3.3 89.2,90.86 ; X3.3 92.85,90.86 ; X3.3 91.03,89.03
  vias: v1(45.94,83.87) v1(46.02,101.53) v1(46.02,81.53) v1(47.62,98.93) v1(48.48,92.76) v1(48.48,90.22) v1(49.23,84.93) v1(51.83,96.33) v1(52.02,101.63) v1(52.29,85.78) v1(52.29,81.33) v1(52.92,90.22) v1(55.47,95.3) v1(55.47,92.76) v1(55.47,87.68) v1(56.73,80.7) v1(59.27,101.02) v1(59.27,97.21) v1(59.27,89.59) v1(59.27,87.05) v1(59.27,81.97) v1(61.18,94.03) v1(64.36,101.02) v1(64.36,95.3) v1(64.36,87.05) v1(64.36,84.51) v1(64.36,80.7) v1(64.99,92.76) v1(64.99,90.22) v1(71.34,101.02) v1(71.34,92.76) v1(71.34,87.05) v1(71.34,83.24) v1(71.34,80.7) v1(73.88,95.94) v1(78.96,100.38) v1(78.96,99.11) v1(78.96,94.03) v1(78.96,92.76) v1(78.96,88.95) v1(78.96,87.68) v1(78.96,82.6) v1(78.96,81.33) v1(82.77,96.57) v1(82.77,90.86) v1(82.77,85.14) v1(88.48,98.48) v1(88.48,93.4) v1(88.48,88.32) v1(88.48,83.24)
KPRD+: length 14.9
  TOP w1: X2.5 86.47,188.01 arc(86.22,187.97) 86.02,187.83 86,187.81 arc(85.79,187.67) 85.55,187.62 VD15.A 82.27,187.62 81.88,188.01 K3.6
KPRD-: length 20.4
  TOP w1: K3.7 73.88,186.11 arc(74.07,185.66) 74.52,185.47 79.33,185.47 arc(79.58,185.43) 79.78,185.29 81.56,183.51 arc(81.77,183.37) 82.01,183.32 VD15.C 85.55,183.32 arc(85.79,183.28) 86,183.14 86.02,183.12 arc(86.22,182.98) 86.47,182.93 X2.6
KPRM+: length 14.9
  TOP w1: X2.7 86.47,177.85 arc(86.22,177.81) 86.02,177.67 86,177.65 arc(85.79,177.51) 85.55,177.46 VD16.A 82.27,177.46 81.88,177.85 K4.6
KPRM-: length 20.4
  TOP w1: X2.8 86.47,172.77 arc(86.22,172.82) 86.02,172.96 86,172.98 arc(85.79,173.12) 85.55,173.16 VD16.C 82.01,173.16 arc(81.77,173.21) 81.56,173.35 79.78,175.13 arc(79.58,175.27) 79.33,175.31 74.52,175.31 arc(74.07,175.5) 73.88,175.95 K4.7
KPUSK+: length 11.6
  TOP w0.45: 78.45,162.61 R41.2 ; R41.2 79.45,160.81 ; R41.2 80.46,162.61
  BOTTOM w1: X2.11 83.77,157.53 83.41,157.9
KPUSK-: length 13.2
  TOP w0.45: 56.86,156.9 R48.2 58.87,156.9
  TOP w0.5: R47.2 57.97,156.66 arc(57.94,156.79) R48.2
  TOP w1: 83.41,153.46 86.32,153.46 arc(86.56,153.41) 86.77,153.27 87.39,152.64 arc(87.6,152.5) 87.84,152.45 X2.12
KRXDR+: length 4.8
  TOP w0.5: FB9.2 87.74,48.95 arc(87.99,49) 88.19,49.13 89.09,50.03 arc(89.3,50.17) 89.54,50.22 91.03,50.22
KRXDR-: length 6.3
  TOP w0.5: FB10.2 86.66,44 arc(86.81,44.36) 87.17,44.5 87.22,44.5 87.66,44.95 arc(87.87,45.09) 88.11,45.14 91.03,45.14
KRXLN+: length 4.8
  TOP w0.5: FB5.2 87.74,99.75 arc(87.99,99.8) 88.19,99.94 89.09,100.83 arc(89.3,100.97) 89.54,101.02 X3.1
KRXLN-: length 6.3
  TOP w0.5: FB6.2 86.66,94.8 arc(86.81,95.16) 87.17,95.3 87.22,95.3 87.66,95.75 arc(87.87,95.89) 88.11,95.94 X3.2
KRXTM+: length 4.8
  TOP w0.5: FB1.2 87.74,74.35 arc(87.99,74.4) 88.19,74.53 89.09,75.43 arc(89.3,75.57) 89.54,75.62 X3.6
KRXTM-: length 6.3
  TOP w0.5: FB2.2 86.66,69.4 arc(86.81,69.76) 87.17,69.9 87.22,69.9 87.66,70.35 arc(87.87,70.49) 88.11,70.54 X3.7
KTM_COM: length 57.1
  TOP w0.45: C8.2 47.63,76.04 ; C8.2 46.73,74.98 ; C8.2 47.63,73.93 ; 75.43,56.57 VD3.A ; VD3.A 78.19,56.57 ; VD3.A 76.81,57.95 ; VD3.A 76.81,55.19 ; R12.1 60.87,61.43 ; R12.1 60.04,60.38 ; R12.1 60.87,59.33 ; VD4.A 76.81,64.3 ; VD4.A 76.81,61.54 ; VD4.A 75.43,62.92 ; VD4.A 78.19,62.92 ; 89.42,65.46 X3.8 ; X3.8 91.03,63.85 ; X3.8 92.63,65.46 ; X3.8 91.03,67.06 ; VD1.A 76.81,75.73 ; VD1.A 76.81,72.97 ; VD1.A 75.43,74.35 ; VD1.A 78.19,74.35 ; 48,61.01 C6.2 48.9,59.96 ; 46.25,60.36 DD2.11 47.7,61.01 ; 48.9,73.5 C9.2 48,72.44 ; 46.66,57.84 47.56,57.84 ; 47.56,57.84 47.56,56.13 ; 47.56,57.84 47.56,59.54 ; 46.25,73.1 DD2.20 47.7,72.44 ; 76.81,66.62 VD2.A ; VD2.A 78.19,68 ; VD2.A 76.81,69.38 ; VD2.A 75.43,68 ; DD2.14 47.7,64.82 ; DD2.16 47.7,67.36
  BOTTOM w0.45: 89.2,65.46 X3.8 ; X3.8 92.85,65.46 ; X3.8 91.03,67.29 ; X3.8 91.03,63.63
  vias: v1(45.94,58.47) v1(46.02,76.13) v1(46.02,56.13) v1(47.62,73.53) v1(48.48,67.36) v1(48.48,64.82) v1(49.23,59.53) v1(51.83,70.93) v1(52.02,76.13) v1(52.29,60.38) v1(52.26,55.89) v1(52.92,64.82) v1(55.47,69.9) v1(55.47,67.36) v1(55.47,62.28) v1(56.7,55.26) v1(59.27,75.62) v1(59.27,71.81) v1(59.27,64.19) v1(59.27,61.65) v1(59.27,56.57) v1(61.18,68.63) v1(64.36,75.62) v1(64.36,69.9) v1(64.36,61.65) v1(64.36,59.11) v1(64.36,55.3) v1(64.99,67.36) v1(64.99,64.82) v1(71.34,75.62) v1(71.34,67.36) v1(71.34,61.65) v1(71.34,57.84) v1(71.34,55.3) v1(73.88,70.54) v1(78.96,74.98) v1(78.96,73.71) v1(78.96,68.63) v1(78.96,67.36) v1(78.96,63.55) v1(78.96,62.28) v1(78.96,57.2) v1(78.96,55.93) v1(82.77,71.17) v1(82.77,65.46) v1(82.77,59.74) v1(88.48,73.08) v1(88.48,68) v1(88.48,62.92) v1(88.48,57.84)
KTXDR+: length 6.3
  TOP w0.5: X3.14 88.11,34.98 arc(87.87,35.03) 87.66,35.16 87.22,35.61 87.17,35.61 arc(86.81,35.76) 86.66,36.12 FB12.2
KTXDR-: length 5.1
  TOP w0.5: 91.03,29.9 89.12,29.9 arc(88.67,30.08) 88.48,30.53 88.48,30.54 arc(88.3,30.99) 87.86,31.17 FB11.2
KTXLN+: length 6.3
  TOP w0.5: FB8.2 86.66,86.92 arc(86.81,86.56) 87.17,86.41 87.22,86.41 87.66,85.97 arc(87.87,85.83) 88.11,85.78 X3.4
KTXLN-: length 5.1
  TOP w0.5: X3.5 89.12,80.7 arc(88.67,80.88) 88.48,81.33 88.48,81.34 arc(88.3,81.79) 87.86,81.97 FB7.2
KTXTM+: length 6.3
  TOP w0.5: FB4.2 86.66,61.52 arc(86.81,61.16) 87.17,61.01 87.22,61.01 87.66,60.56 arc(87.87,60.43) 88.11,60.38 X3.9
KTXTM-: length 5.1
  TOP w0.5: X3.10 89.12,55.3 arc(88.67,55.48) 88.48,55.93 88.48,55.94 arc(88.3,56.39) 87.86,56.57 FB3.2
KWARN+: length 14.9
  TOP w1: K2.6 81.88,198.17 82.27,197.78 VD14.A 85.55,197.78 arc(85.79,197.83) 86,197.97 86.02,197.99 arc(86.22,198.13) 86.47,198.17 X2.3
KWARN-: length 20.4
  TOP w1: K2.7 73.88,196.27 arc(74.07,195.82) 74.52,195.63 79.33,195.63 arc(79.58,195.59) 79.78,195.45 81.56,193.67 arc(81.77,193.53) 82.01,193.48 VD14.C 85.55,193.48 arc(85.79,193.44) 86,193.3 86.02,193.28 arc(86.22,193.14) 86.47,193.09 X2.4
N42682_A1: length 105.4
  TOP w0.25: R4.2 16.28,164.25 arc(16.53,164.2) 16.73,164.06 17.81,162.98 arc(17.95,162.78) 18,162.53 18,91.43 arc(18.05,91.19) 18.19,90.98 28.93,80.24 arc(29.07,80.03) 29.11,79.79 R2.1 arc(29.07,78.59) 28.96,78.41 28.35,77.8 arc(28.21,77.59) 28.16,77.35 28.16,68.9 arc(28.21,68.65) 28.35,68.45 29.24,67.55 arc(29.45,67.41) 29.69,67.36 DD1.2
N42682_A2: length 85.4
  TOP w0.25: DD3.2 29.69,92.76 arc(29.45,92.81) 29.24,92.95 28.35,93.85 arc(28.21,94.05) 28.16,94.3 28.16,102.75 arc(28.21,102.99) 28.35,103.2 28.96,103.81 arc(29.07,103.99) R14.1 29.11,105.01 arc(29.07,105.25) 28.93,105.46 20.73,113.66 arc(20.59,113.86) 20.54,114.11 20.54,165.5 arc(20.49,165.75) 20.35,165.95 17.16,169.14 arc(16.96,169.28) 16.71,169.33 R16.2
N42682_A3: length 125
  TOP w0.25: R28.2 15.27,159.04 arc(15.41,158.83) 15.46,158.59 15.46,67.99 arc(15.51,67.75) 15.65,67.54 28.93,54.26 arc(29.07,54.06) 29.11,53.81 R26.1 arc(29.07,53.19) 28.96,53.01 28.35,52.4 arc(28.21,52.19) 28.16,51.95 28.16,43.5 arc(28.21,43.25) 28.35,43.05 29.24,42.15 arc(29.45,42.01) 29.69,41.96 DD5.2
N48487_A1: length 26.2
  TOP w0.25: VD3.C 81.11,57.97 arc(81.06,58.21) 80.92,58.41 80.42,58.92 arc(80.21,59.06) 79.97,59.11 67.79,59.11 arc(67.55,59.06) 67.34,58.92 66.45,58.02 arc(66.24,57.89) 66,57.84 R9.2 R11.2
  TOP w0.5: FB3.1 VD3.C
N48487_A2: length 26.2
  TOP w0.25: R23.2 R21.2 66,83.24 arc(66.24,83.29) 66.45,83.42 67.34,84.32 arc(67.55,84.46) 67.79,84.51 79.97,84.51 arc(80.21,84.46) 80.42,84.32 80.92,83.81 arc(81.06,83.61) 81.11,83.37 VD7.C
  TOP w0.5: FB7.1 VD7.C
N48487_A3: length 26.2
  TOP w0.25: R35.2 R33.2 66,32.44 arc(66.24,32.49) 66.45,32.62 67.34,33.52 arc(67.55,33.66) 67.79,33.71 79.97,33.71 arc(80.21,33.66) 80.42,33.52 80.92,33.02 arc(81.06,32.81) 81.11,32.57 VD11.C
  TOP w0.5: FB11.1 VD11.C
N48539_A1: length 23.6
  TOP w0.25: VD1.C 81.11,72.95 arc(81.06,72.71) 80.92,72.5 80.42,72 arc(80.21,71.86) 79.97,71.81 72.87,71.81 arc(72.63,71.86) 72.42,72 72.06,72.36 arc(71.85,72.5) 71.61,72.55 S1.3 S1.4 64.51,72.55 arc(64.27,72.6) 64.06,72.73 63.91,72.89 arc(63.7,73.03) 63.46,73.08 R5.2
  TOP w0.5: FB1.1 VD1.C
N48539_A2: length 23.6
  TOP w0.25: R17.2 63.46,98.48 arc(63.7,98.43) 63.91,98.29 64.06,98.14 arc(64.27,98) 64.51,97.95 S3.4 S3.3 71.61,97.95 arc(71.85,97.9) 72.06,97.76 72.42,97.39 arc(72.63,97.26) 72.87,97.21 79.97,97.21 arc(80.21,97.26) 80.42,97.39 80.92,97.9 arc(81.06,98.11) 81.11,98.35 VD5.C
  TOP w0.5: FB5.1 VD5.C
N48539_A3: length 23.6
  TOP w0.25: VD9.C 81.11,47.55 arc(81.06,47.31) 80.92,47.1 80.42,46.59 arc(80.21,46.46) 79.97,46.41 72.87,46.41 arc(72.63,46.46) 72.42,46.59 72.06,46.96 arc(71.85,47.1) 71.61,47.15 S5.3 S5.4 64.51,47.15 arc(64.27,47.2) 64.06,47.34 63.91,47.49 arc(63.7,47.63) 63.46,47.68 R29.2
  TOP w0.5: FB9.1 VD9.C
N48547_A1: length 26.2
  TOP w0.25: R8.2 62.77,69.46 arc(62.82,69.33) 62.96,69.27 63.09,69.27 R7.1 R6.1 arc(73.45,68.36) 73.63,68.47 75.51,70.35 arc(75.72,70.49) 75.96,70.54 79.97,70.54 arc(80.21,70.49) 80.42,70.35 80.92,69.84 arc(81.06,69.64) 81.11,69.4 VD2.C
  TOP w0.5: FB2.1 VD2.C
N48547_A2: length 26.2
  TOP w0.25: R20.2 62.77,94.86 arc(62.82,94.73) 62.96,94.67 63.09,94.67 R19.1 R18.1 arc(73.45,93.76) 73.63,93.87 75.51,95.75 arc(75.72,95.89) 75.96,95.94 79.97,95.94 arc(80.21,95.89) 80.42,95.75 80.92,95.25 arc(81.06,95.04) 81.11,94.8 VD6.C
  TOP w0.5: FB6.1 VD6.C
N48547_A3: length 26.2
  TOP w0.25: R32.2 62.77,44.06 arc(62.82,43.93) 62.96,43.87 63.09,43.87 R31.1 R30.1 arc(73.45,42.96) 73.63,43.07 75.51,44.95 arc(75.72,45.09) 75.96,45.14 79.97,45.14 arc(80.21,45.09) 80.42,44.95 80.92,44.45 arc(81.06,44.24) 81.11,44 VD10.C
  TOP w0.5: FB10.1 VD10.C
N48667_A1: length 25.7
  TOP w0.25: R10.2 R12.2 79.97,60.38 arc(80.21,60.43) 80.42,60.56 80.92,61.07 arc(81.06,61.28) 81.11,61.52 VD4.C
  TOP w0.5: FB4.1 VD4.C
N48667_A2: length 25.7
  TOP w0.25: R22.2 R24.2 79.97,85.78 arc(80.21,85.83) 80.42,85.97 80.92,86.47 arc(81.06,86.68) 81.11,86.92 VD8.C
  TOP w0.5: FB8.1 VD8.C
N48667_A3: length 25.7
  TOP w0.25: R34.2 R36.2 79.97,34.98 arc(80.21,35.03) 80.42,35.16 80.92,35.67 arc(81.06,35.88) 81.11,36.12 VD12.C
  TOP w0.5: FB12.1 VD12.C
N48675_A1: length 5.8
  TOP w0.25: S1.2 69.44,64.56 arc(69.48,64.8) 69.62,65.01 70.84,66.23 arc(71.04,66.37) 71.29,66.41 R6.2
N48675_A2: length 5.8
  TOP w0.25: R18.2 71.29,91.81 arc(71.04,91.77) 70.84,91.63 69.62,90.41 arc(69.48,90.2) 69.44,89.96 S3.2
N48675_A3: length 5.8
  TOP w0.25: S5.2 69.44,39.16 arc(69.48,39.4) 69.62,39.61 70.84,40.83 arc(71.04,40.97) 71.29,41.01 R30.2
N102211_A1: length 5.8
  TOP w0.25: R7.2 65.04,66.41 arc(65.29,66.37) 65.49,66.23 66.71,65.01 arc(66.85,64.8) 66.89,64.56 S1.1
N102211_A2: length 5.8
  TOP w0.25: R19.2 65.04,91.81 arc(65.29,91.77) 65.49,91.63 66.71,90.41 arc(66.85,90.2) 66.89,89.96 S3.1
N102211_A3: length 5.8
  TOP w0.25: S5.1 66.89,39.16 arc(66.85,39.4) 66.71,39.61 65.49,40.83 arc(65.29,40.97) 65.04,41.01 R31.2
PUSK: length 7.9
  TOP w0.25: X1.A21 X1.C21 R44.1
RXDR: length 7.9
  TOP w0.25: R27.1 X1.C8 X1.A8
RXLN: length 7.9
  TOP w0.25: R15.1 X1.C12 X1.A12
RXTM: length 7.9
  TOP w0.25: R3.1 X1.C10 X1.A10
TXDR: length 7.9
  TOP w0.25: R28.1 X1.C7 X1.A7
TXLN: length 7.9
  TOP w0.25: R16.1 X1.C11 X1.A11
TXTM: length 7.9
  TOP w0.25: X1.A9 X1.C9 R4.1
VISO_A1: length 54.1
  TOP w0.25: C7.1 55.84,57.84 arc(56.08,57.79) 56.29,57.65 58.45,55.48 arc(58.66,55.35) 58.9,55.3 R11.1
  TOP w0.5: DD2.12 50.38,62.28 arc(50.54,62.22) 50.6,62.07 C6.1 50.6,59.75 50.66,59.69 C7.1 v1(49.12,57.84) ; C8.1 v1(51.02,74.98) 51.02,74.61 arc(50.97,74.37) 50.83,74.16 50.79,74.11 arc(50.65,73.91) 50.6,73.67 C9.1 50.6,71.39 arc(50.54,71.24) 50.38,71.17 DD2.19
  BOTTOM w0.5: v1(51.02,74.98) 47.47,74.98 arc(47.23,74.94) 47.02,74.8 46.13,73.9 arc(45.99,73.69) 45.94,73.45 45.94,61.28 arc(45.99,61.03) 46.13,60.83 v1(49.12,57.84)
VISO_A2: length 54.1
  TOP w0.25: C16.1 55.84,83.24 arc(56.08,83.19) 56.29,83.05 58.45,80.89 arc(58.66,80.75) 58.9,80.7 R23.1
  TOP w0.5: v1(49.12,83.24) C16.1 50.66,85.15 50.6,85.21 C15.1 50.6,87.47 arc(50.54,87.62) 50.38,87.69 49.25,87.69 49.25,87.68 DD4.12 ; C17.1 v1(51.02,100.38) 51.02,100.01 arc(50.97,99.77) 50.83,99.56 50.79,99.52 arc(50.65,99.31) 50.6,99.07 C18.1 50.6,96.79 arc(50.54,96.64) 50.38,96.57 DD4.19
  BOTTOM w0.5: v1(49.12,83.24) 46.13,86.23 arc(45.99,86.43) 45.94,86.68 45.94,98.85 arc(45.99,99.09) 46.13,99.3 47.02,100.2 arc(47.23,100.34) 47.47,100.38 v1(51.02,100.38)
VISO_A3: length 54.1
  TOP w0.25: C25.1 55.84,32.44 arc(56.08,32.39) 56.29,32.25 58.45,30.09 arc(58.66,29.95) 58.9,29.9 R35.1
  TOP w0.5: C26.1 v1(51.02,49.58) 51.02,49.21 arc(50.97,48.97) 50.83,48.76 50.79,48.72 arc(50.65,48.51) 50.6,48.27 C24.1 50.6,45.99 arc(50.54,45.84) 50.38,45.77 DD6.19 ; v1(49.12,32.44) C25.1 50.66,34.29 50.6,34.35 C27.1 50.6,36.67 arc(50.54,36.82) 50.38,36.88 DD6.12
  BOTTOM w0.5: v1(49.12,32.44) 46.13,35.43 arc(45.99,35.63) 45.94,35.88 45.94,48.05 arc(45.99,48.29) 46.13,48.5 47.02,49.4 arc(47.23,49.54) 47.47,49.58 v1(51.02,49.58)
